# Altium PCB PCB1.PcbDoc
Units mm, origin at the board's own origin, x right, y up, seen from the top; angles counter-clockwise.
Board outline 47 x 47 mm, 2 copper layers (Top Layer, Bottom Layer), stack 1.58 mm thick; 33 components, 19 nets, 96 pads, 9 vias.
Unrouted connection lines stored in the file: 17.
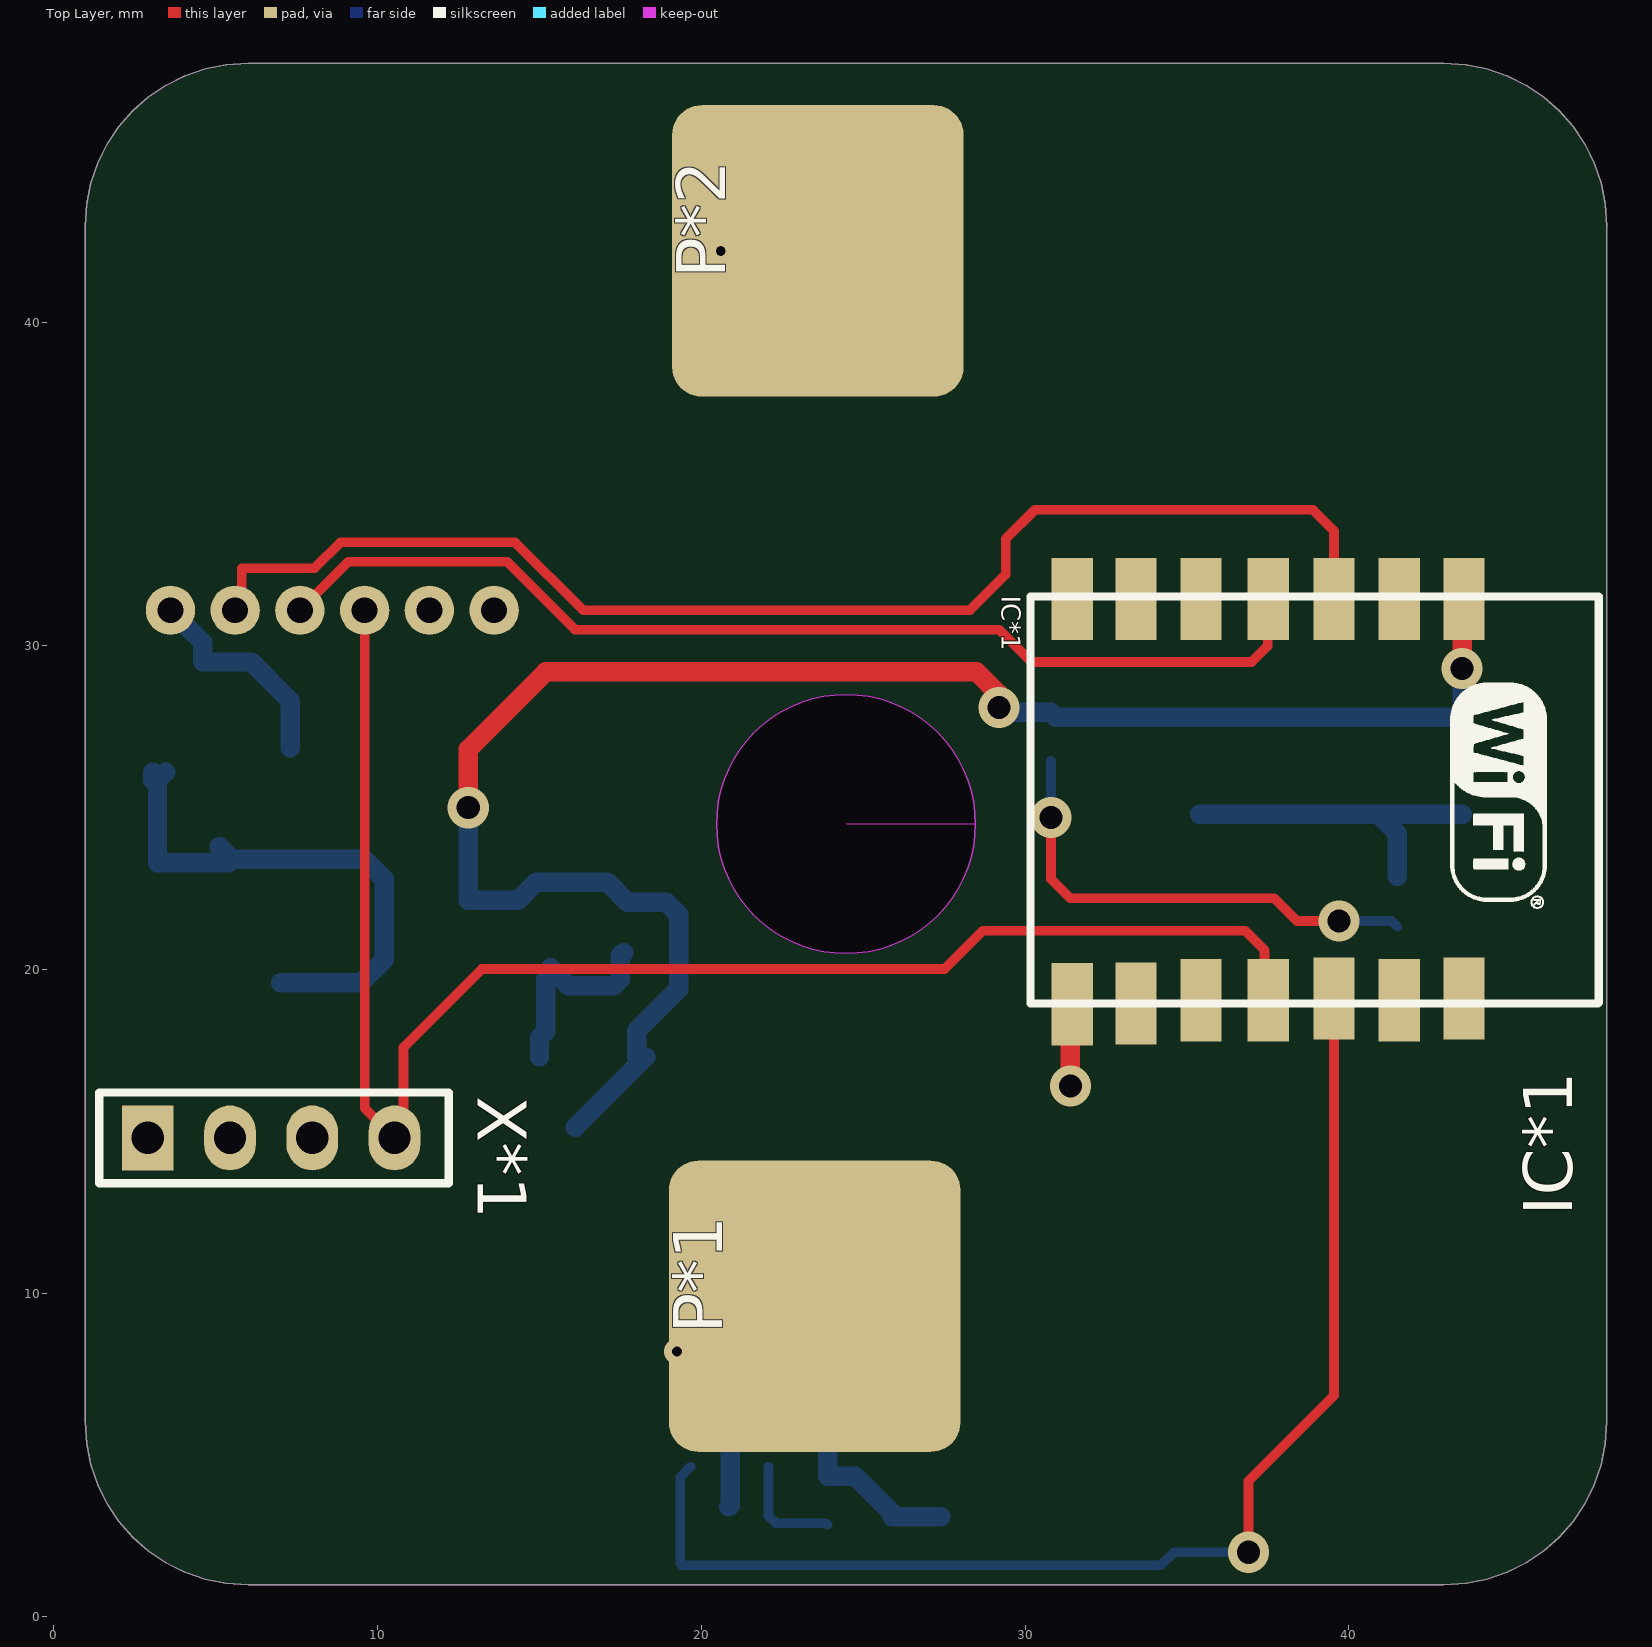
[diagram p0: Top Layer view]
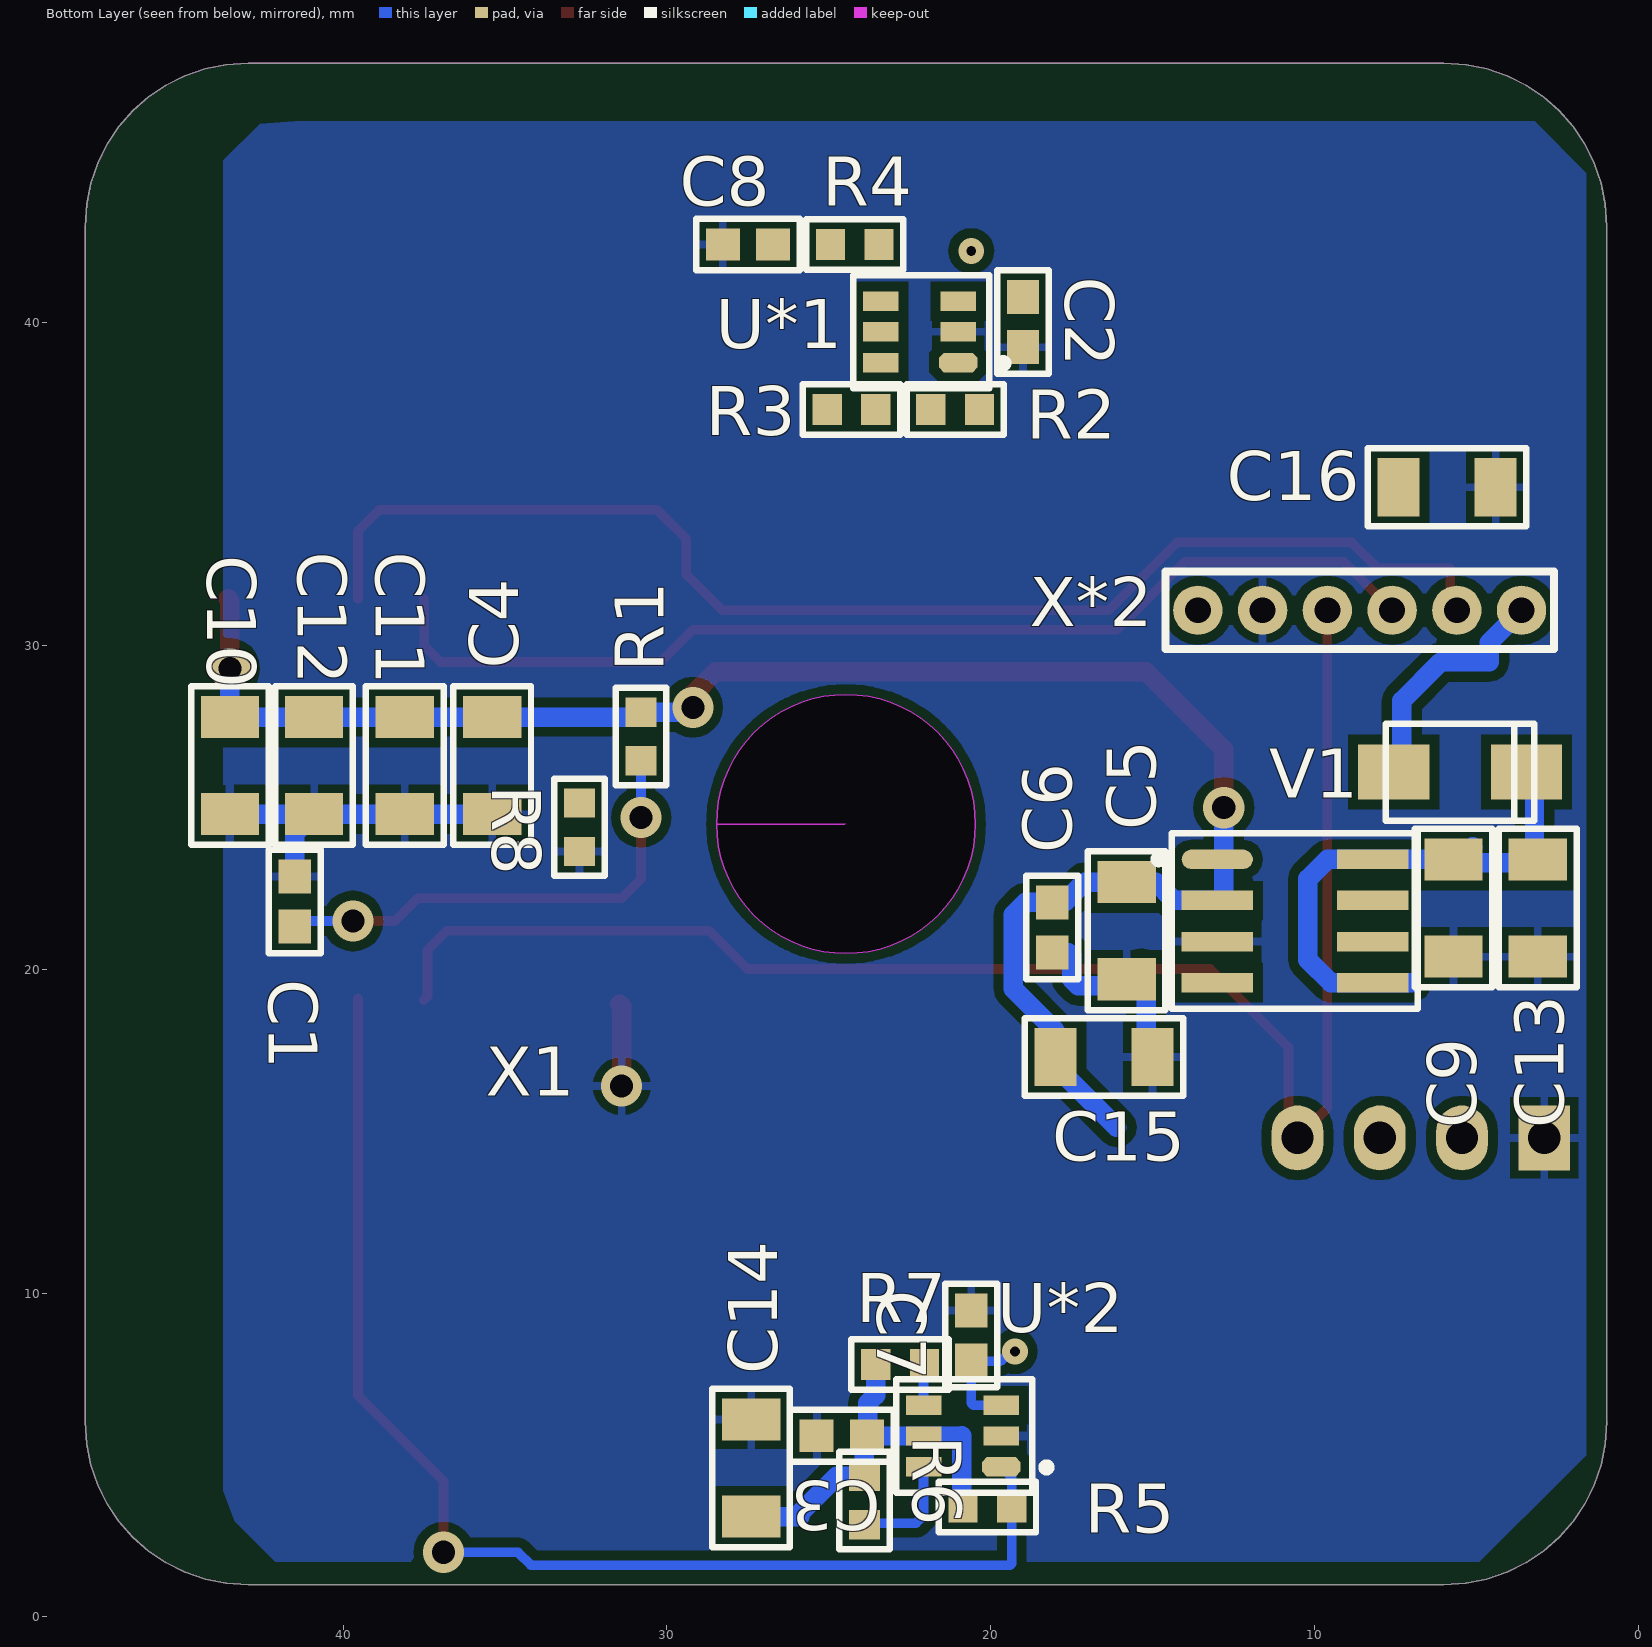
[diagram p1: Bottom Layer view, seen from below]

## Layer stack, top to bottom
Top Solder: solder mask 0.0102, Solder Resist, Dk 3.5
Top Layer: signal copper 0.0356
Dielectric 1: dielectric 1.509, FR-4, Dk 4.8
Bottom Layer: signal copper 0.035
Bottom Solder: solder mask 0.0102, Solder Resist, Dk 3.5

## Board outline
1.641,3.498 1.352,4.084 1.142,4.703 1.014,5.344 0.969,6.03 0.969,42.964 1.014,43.649 1.142,44.29 1.352,44.909 1.641,45.496 2.004,46.039 2.435,46.531 2.927,46.962 3.47,47.325 4.057,47.614 4.676,47.824 5.317,47.952 6.002,47.997 42.937,47.997 43.622,47.952 44.263,47.824 44.882,47.614 45.468,47.325 46.012,46.962 46.503,46.531 46.934,46.039 47.298,45.496 47.587,44.909 47.797,44.29 47.924,43.649 47.969,42.964 47.969,6.03 47.924,5.344 47.797,4.703 47.587,4.084 47.298,3.498 46.934,2.954 46.503,2.463 46.012,2.032 45.468,1.668 44.882,1.379 44.263,1.169 43.622,1.042 42.937,0.997 6.002,0.997 5.317,1.042 4.676,1.169 4.057,1.379 3.47,1.668 2.927,2.032 2.435,2.463 2.004,2.954
cut-out: 24.469,20.497 cw(c24.469,24.497) 20.469,24.497 cw(c24.469,24.497) 24.469,28.497 cw(c24.469,24.497) 28.469,24.497 cw(c24.469,24.497)
cut-out: 28.469,24.497 24.503,24.497 24.5,24.5

## Design rules (kind name [scope] priority, off if disabled: settings)
Clearance [All] p1: gap=0.3
PolygonConnect [All] p1: connectstyle=Relief reliefconductorwidth=0.254 reliefentries=4 polygonreliefangle="90 Angle" airgapwidth=0.254
RoomDefinition Sheet1 [InComponentClass('Sheet1')] p1: confinementstyle=ConfineIn formatcopy=TRUE lockcomponents=FALSE outline -47.337,-76.7 3.463,-76.7 3.463,-51.3 -47.337,-51.3
RoutingVias [All] p1: holewidth=0.3 width=0.8 viastyle="Through Hole" minholewidth=0.711 minwidth=1.27 maxholewidth=0.711 maxwidth=1.27
SilkToSilkClearance [All] p1 off: silktosilkclearance=0.254
SilkToSolderMaskClearance [IsPad] p1 off: minsilkscreentomaskgap=0.254 clearancetoexposedcopper=TRUE
SolderMaskExpansion [All] p1: expansion=0.102
Width Width_1 [InNetClass('PWR')] p1: maxlimit=2 minlimit=0.5 preferedwidth=0.6
Width [All] p2: maxlimit=0.3 minlimit=0.3 preferedwidth=0.3
28 further rules are at their usual default settings.

## Classes and differential pairs
net class PWR: 3V3 12V GND NetV1_A

## Components (designator, comment, footprint, x,y, rotation, side; value= is the part's Value field where it differs from the comment)
C1 "100nF/50V" CAP_0603_IPC_B 41.5,22.1 r270 bottom
C2 "22pF/50V" CAP_0603_IPC_B 19,40 r90 bottom
C3 "100nF/50V" CAP_0603_IPC_B 24.6,5.6 r180 bottom
C4 "22µF/16V" CAP_1206_IPC_B 35.4,26.3 r90 bottom
C5 "22µF/16V" CAP_1206_IPC_B 15.8,21.2 r90 bottom
C6 "100nF/50V" CAP_0603_IPC_B 18.1,21.3 r90 bottom
C7 "22pF/50V" CAP_0603_IPC_B 20.6,8.7 r270 bottom
C8 "100nF/50V" CAP_0603_IPC_B 27.5,42.4 r180 bottom
C9 "22µF/16V" CAP_1206_IPC_B 5.7,21.9 r90 bottom
C10 "22µF/16V" CAP_1206_IPC_B 43.5,26.3 r90 bottom
C11 "22µF/16V" CAP_1206_IPC_B 38.1,26.3 r90 bottom
C12 "22µF/16V" CAP_1206_IPC_B 40.9,26.3 r90 bottom
C13 "22µF/16V" CAP_1206_IPC_B 3.1,21.9 r90 bottom
C14 "22µF/16V" CAP_1206_IPC_B 27.4,4.6 r270 bottom
C15 "22µF/16V" CAP_1206_IPC_B 16.5,17.3 r0 bottom
C16 "22µF/16V" CAP_1206_IPC_B 5.9,34.9 r0 bottom
IC*1 "ESP8266 ESP-03" "ESP8266 ESP-03" 30.3,31.4 r270 top
P*1 "Touch Pad" "Touch Pad" 23.5,9.6 r90 top
P*2 "Touch Pad" "Touch Pad" 23.6,42.2 r90 top
R1 "10k" RES_0603_IPC_B 30.8,27.2 r90 bottom
R2 "10k" RES_0603_IPC_B 21.1,37.3 r180 bottom
R3 "0R" RES_0603_IPC_B 24.3,37.3 r0 bottom
R4 "0R" RES_0603_IPC_B 24.2,42.4 r0 bottom
R5 "10k" RES_0603_IPC_B 20.1,3.4 r180 bottom
R6 "0R" RES_0603_IPC_B 23.9,3.6 r90 bottom
R7 "0R" RES_0603_IPC_B 22.8,7.8 r0 bottom
R8 "10k" RES_0603_IPC_B 32.7,24.4 r270 bottom
U*1 "TTP223" SOT95P280X145-6N 22.2,39.7 r0 bottom
U*2 "TTP223" SOT95P280X145-6N 20.873,5.592 r0 bottom
V1 "S1M" SMA_DO214AC 5.5,26.1 r180 bottom
X1 "BDxxGC0WEFJ" SO8_127P600X176-8N 10.6,21.5 r180 bottom
X*1 "1x4P" 1x4p 2.9,14.8 r0 top
X*2 "1x6p" M22-7130642 13.6,31.1 r180 bottom locked

## Footprints (in the part's own frame and the unit in brackets; to place one, negate y for a bottom-side part, rotate by r counter-clockwise, add the part's x,y. Pads: shape width x height; smd on the part's side, far side on the other; paste and mask are expansions set on the pad)
1x4p [mm]
  rect 1.6x2 / inner oval 1.6x2 / far side rect 1.6x2 hole 1: 1(0,0)
  oval 1.6x2 hole 1: 2(2.54,0) 3(5.08,0) 4(7.62,0)
  silkscreen extent -1.5,-1.4 9.3,1.4
CAP_0603_IPC_B [mm]
  rect 1.05x1 smd: 1(-0.775,0) 2(0.775,0)
  silkscreen extent -1.6,-0.8 1.6,0.8, body extent -1.3,-0.5 1.3,0.5, height 0.8
CAP_1206_IPC_B [mm]
  rect 1.3x1.8 smd: 1(-1.5,0) 2(1.5,0)
  silkscreen extent -2.45,-1.2 2.45,1.2, body extent -2.15,-0.9 2.15,0.9, height 0.79
"ESP8266 ESP-03" [mil] "ESP8266 ESP-03"
  rect 100x50 smd: 1(-2,522) 2(-2,443.27) 3(-2,364) 4(-2,284) 5(-2,202) 6(-2,123) 7(-2,45.57) 8(491,45.57) 9(490,123) 10(486,202) 11(486,284) 12(484,364) 13(486,443.27) 14(484,522)
  silkscreen extent -5,-5 490,686, body extent -1,1 483,682, height 134
M22-7130642 [mil]
  round 60 hole 31.5: 1(0,0) 2(78.74,0) 3(157.48,0) 4(236.22,0) 5(314.96,0) 6(393.7,0)
  silkscreen extent -39,-47 433,47, body extent -49,-47 443,47, height 173
RES_0603_IPC_B [mm]
  rect 0.9x0.95 smd: 1(-0.75,0) 2(0.75,0)
  silkscreen extent -1.5,-0.77 1.5,0.77, body extent -1.2,-0.48 1.2,0.48, height 0.45
SMA_DO214AC [mm]
  rect 2.2x1.7 smd paste+0 mask+0.05: A(-2.05,0) K(2.05,0)
  silkscreen extent -2.29,-1.5 2.29,1.5, body extent -3.15,-1.5 3.15,1.5, height 2.62
SO8_127P600X176-8N [mm] "SOIC, 8-Leads, Body 5.0x4.0mm (max), Pitch 1.27mm, IPC Medium Density"
  oval 2.2x0.6 smd: 1(-2.4,1.905)
  rect 2.2x0.6 smd: 2(-2.4,0.635) 3(-2.4,-0.635) 4(-2.4,-1.905) 5(2.4,-1.905) 6(2.4,-0.635) 7(2.4,0.635) 8(2.4,1.905)
  silkscreen extent -4.34,-2.71 3.8,2.71, body extent -3.5,-2.5 3.5,2.5, height 1.74
SOT95P280X145-6N [mm]
  oct 1.2x0.6 smd: 1(-1.2,0.95)
  rect 1.1x0.6 smd: 2(-1.2,0) 3(-1.2,-0.95) 4(1.2,-0.95) 5(1.2,0) 6(1.2,0.95)
  silkscreen extent -2.72,-1.75 2.05,1.75, body extent -1.8,-1.5 1.75,1.5, height 1.3
"Touch Pad" [mm]
  rrect20% 9x9 smd: 1(0,0)
  body extent -4,-4 4,4, height 7.19

## Part data
C1 C3 C6 C8: library part 100nF_50V_0603_02-1902, "02-1902 - SMD Capacitor 0603 100nF 50V X7R"
C2 C7: library part 56pF_50V_0603_02-0492, "02-0492 - SMD Capacitor 0603 56pF 50V C0G"
C4 C5 C9 C10 C11 C12 C13 C14 C15 C16: library part 22µF_10V_1206_02-4857, "02-4857 - SMD Capacitor 1206 22µF 10V X7R"
R1 R2 R5 R8: library part 10k_0603_01-0487, "01-0487 - SMD Resistor 0603 0.1W 1%"
R3 R4 R6 R7: library part 0R_0603_01-0080, "01-0080 - SMD Resistor 0603 0.1W 5%"
V1: library part D_Diode_1.000V_1A_08-5559, "08-5559_Diode_SMT_SMA_DO214AC_1.000V_1A"

## Via types
v1: diameter 1.27, hole 0.711, Top Layer to Bottom Layer, 7 vias
v2: diameter 0.8, hole 0.3, Top Layer to Bottom Layer, 2 vias

## Nets (pads, with @x,y where several pads share a name; then routed paths per layer and width w, separated by ;. In a path a pad name is that pad's centre, name@x,y a point inside that pad or via, vN(x,y) a via of type N, cw(c..) or ccw(c..) an arc to the next point about the centre after c; other vN are vias at no path point)
3V3: C3.2 C4.2 C5.2 C6.2 C8.2 C10.2 C11.2 C12.2 C14.2 C15.2 C16.2 IC*1.1 R1.2 R2.1 R3.2 R4.2 R5.1 R6.2 R7.2 U*1.5 U*2.5 X1.1 X1.2 | length 68.6
  Top Layer w0.6: v1(12.8,25) 12.8,26.8 15.2,29.2 28.5,29.2 29.2,28.5 v1(29.2,28.1) ; v1(43.5,29.3) 43.5,31.392 IC*1.1
  Bottom Layer w0.6: v1@12.8,24.9 12.8,22.135 14.335,22.135 C5.2@14.9,22.7 ; C5.2@15,22.7 17.1,22.7 17.725,22.075 18.925,22.075 19.3,21.7 19.3,19.4 18,18.1 C15.2 ; 16.1,15.122 C15.2@18.278,17.3 ; R5.1 20.9,3.45 20.9,5.6 20.908,5.592 U*2.5 C3.2@23.817,5.592 ; R7.2 23.55,6.85 23.8,6.6 23.8,5.609 C3.2@23.817,5.592 ; C14.2 25.9,3.1 25.9,3.2 24.75,4.35 R6.2 23.9,5.525 C3.2 C3.2@23.817,5.592 ; v1(29.2,28.1) 29.35,27.95 R1.2 30.95,27.8 C4.2 C11.2 C12.2 C10.2 v1(43.5,29.3)
12V: C9.2 C13.2 V1.K X1.5 X1.8 | length 17
  Bottom Layer w0.6: V1.K@3.05,25.85 V1.K@3.05,26.1 ; V1.K 3.2,25.85 3.2,23.3 5.395,23.3 C9.2@5.497,23.403 ; C9.2@5.1,23.8 5.105,23.8 5.5,23.405 9.595,23.405 10.2,22.8 10.2,20.3 9.495,19.595 7,19.595
BT1: IC*1.6 R2.2 U*1.1
BT2: IC*1.12 R5.2 U*2.1 | length 39.1
  Top Layer w0.3: v1(36.9,2) 36.9,4.2 39.546,6.846 IC*1.12
  Bottom Layer w0.3: U*2.1 19.35,4.319 R5.2 19.35,1.65 19.4,1.6 34.2,1.6 34.6,2 v1(36.9,2)
DOWNCLOSE: IC*1.3 X*2.5 | length 40.6
  Top Layer w0.3: X*2.5 5.8,31.3 5.8,32.4 8.051,32.4 8.851,33.2 14.249,33.2 16.349,31.1 28.3,31.1 29.4,32.2 29.4,33.3 30.3,34.2 38.9,34.2 39.546,33.554 IC*1.3
DOWNOPEN: IC*1.4 X*2.4 | length 33.5
  Top Layer w0.3: X*2.4 9.1,32.6 14,32.6 16.1,30.5 29.2,30.5 30.2,29.5 37,29.5 37.494,29.994 37.5,29.994 37.5,31.437 IC*1.4
GND: C1.1 C2.1 C3.1 C4.1 C5.1 C6.1 C7.1 C8.1 C9.1 C10.1 C11.1 C12.1 C13.1 C14.1 C15.1 C16.1 IC*1.8 R8.2 U*1.2 U*2.2 X1.3 X*1.1 X*2.2 | length 19
  Top Layer w0.6: v1(31.4,16.4) 31.4,18.871 IC*1.8
  Bottom Layer w0.6: C15.1 15,17.9 15.2,18.1 15.2,19.7 C5.1@15.45,19.95 ; C5.1@15.35,20.05 C5.1@15.45,19.95 ; C6.1@17.6,20.525 17.5,20.425 17.5,19.7 17.3,19.5 15.9,19.5 C5.1@15.45,19.95 ; C4.1 C11.1 C12.1 ; C1.1 41.5,24.2 C12.1 ; C10.1 C12.1
GPIO0: IC*1.7 X*1.2
NetIC*1_5: IC*1.5 R8.1
NetR3_1: R3.1 U*1.6
NetR4_1: R4.1 U*1.4
NetR6_1: R6.1 U*2.6 | length 3.5
  Bottom Layer w0.3: U*2.6 22.073,3.127 22.3,2.9 23.85,2.9 R6.1
NetR7_1: R7.1 U*2.4 | length 1.3
  Bottom Layer w0.3: R7.1 22.073,7.777 U*2.4
NetV1_A: V1.A X*2.6 | length 6.7
  Bottom Layer w0.6: X*2.6 4.6,30.1 4.6,29.5 6.1,29.5 7.3,28.3 V1.A@7.3,26.85
PAD1: C2.2 P*2.1 U*1.3
  other v2: 20.6,42.2
PAD2: C7.2 P*1.1 U*2.3 | length 3.8
  Bottom Layer w0.3: v2(19.25,8.2) 19.4,8.2 19.7,7.9 20.575,7.9 C7.2 20.6,6.6 20.542,6.542 U*2.3
PD: C1.2 IC*1.13 R1.1 | length 15
  Top Layer w0.3: v1(30.8,24.7) 30.8,22.8 31.4,22.2 37.7,22.2 38.4,21.5 v1(39.7,21.5)
  Bottom Layer w0.3: v1(30.8,24.7) R1.1 ; v1(39.7,21.5) 41.325,21.5 C1.2
UPCLOSE: IC*1.11 X*1.4 X*2.3 | length 49.5
  Top Layer w0.3: X*2.3 9.6,15.72 X*1.4 10.8,15.08 10.8,17.6 13.219,20.019 27.519,20.019 28.7,21.2 36.8,21.2 37.4,20.6 37.4,19.169 IC*1.11
UPOPEN: IC*1.10 X*2.1
pads on no net: IC*1.2 IC*1.9 IC*1.14 X1.4 X1.6 X1.7 X*1.3

## Polygon pours and split planes (outlines as drawn)
GND on Bottom Layer "Bottom Layer-No Net" (solid, pour order 0): 1.6,44.6 1.6,5 2.2,4.4 4.9,1.7 7.1,1.7 42.1,1.7 43.354,2.954 43.7,3.9 43.7,44.6 43.7,45 42.569,46.131 41.5,46.2 3.2,46.2

## Keep-outs
Keep-Out Layer:
  circle w0.013: c24.469,24.497 r4
  lines w0.013: 0.969,6.03 0.969,42.964 1.014,43.649 1.142,44.29 1.352,44.909 1.641,45.496 2.004,46.039 2.435,46.531 2.927,46.962 3.47,47.325 4.057,47.614 4.676,47.824 5.317,47.952 6.002,47.997 42.937,47.997 43.622,47.952 44.263,47.824 44.882,47.614 45.468,47.325 46.012,46.962 46.503,46.531 46.934,46.039 47.298,45.496 47.587,44.909 47.797,44.29 47.924,43.649 47.969,42.964 47.969,6.03 47.924,5.344 47.797,4.703 47.587,4.084 47.298,3.498 46.934,2.954 46.503,2.463 46.012,2.032 45.468,1.668 44.882,1.379 44.263,1.169 43.622,1.042 42.937,0.997 6.002,0.997 5.317,1.042 4.676,1.169 4.057,1.379 3.47,1.668 2.927,2.032 2.435,2.463 2.004,2.954 1.641,3.498 1.352,4.084 1.142,4.703 1.014,5.344 0.969,6.03

## Silkscreen, mask and mechanical layers (free items; w line width, h text height)
Drill Drawing:
  text ".LEGEND" at 50.543,4.58 h1.52
  text "Drill Drawing." at 50.543,2.04 h1.52

## Text inside footprints (layer, text, board x,y; h text height)
V1: Mechanical 2 "K" at 2.876,25.7 h0.8